# Altium PCB PCB1.PcbDoc (part 3 of 5)
Units mm, origin at the board's own origin, x right, y up, seen from the top; angles counter-clockwise.
Board outline 160 x 110 mm, 4 copper layers (Top Layer, Power Layer, GND Layer, Bottom Layer), stack 1.714 mm thick; 504 components, 362 nets, 1765 pads, 999 vias.
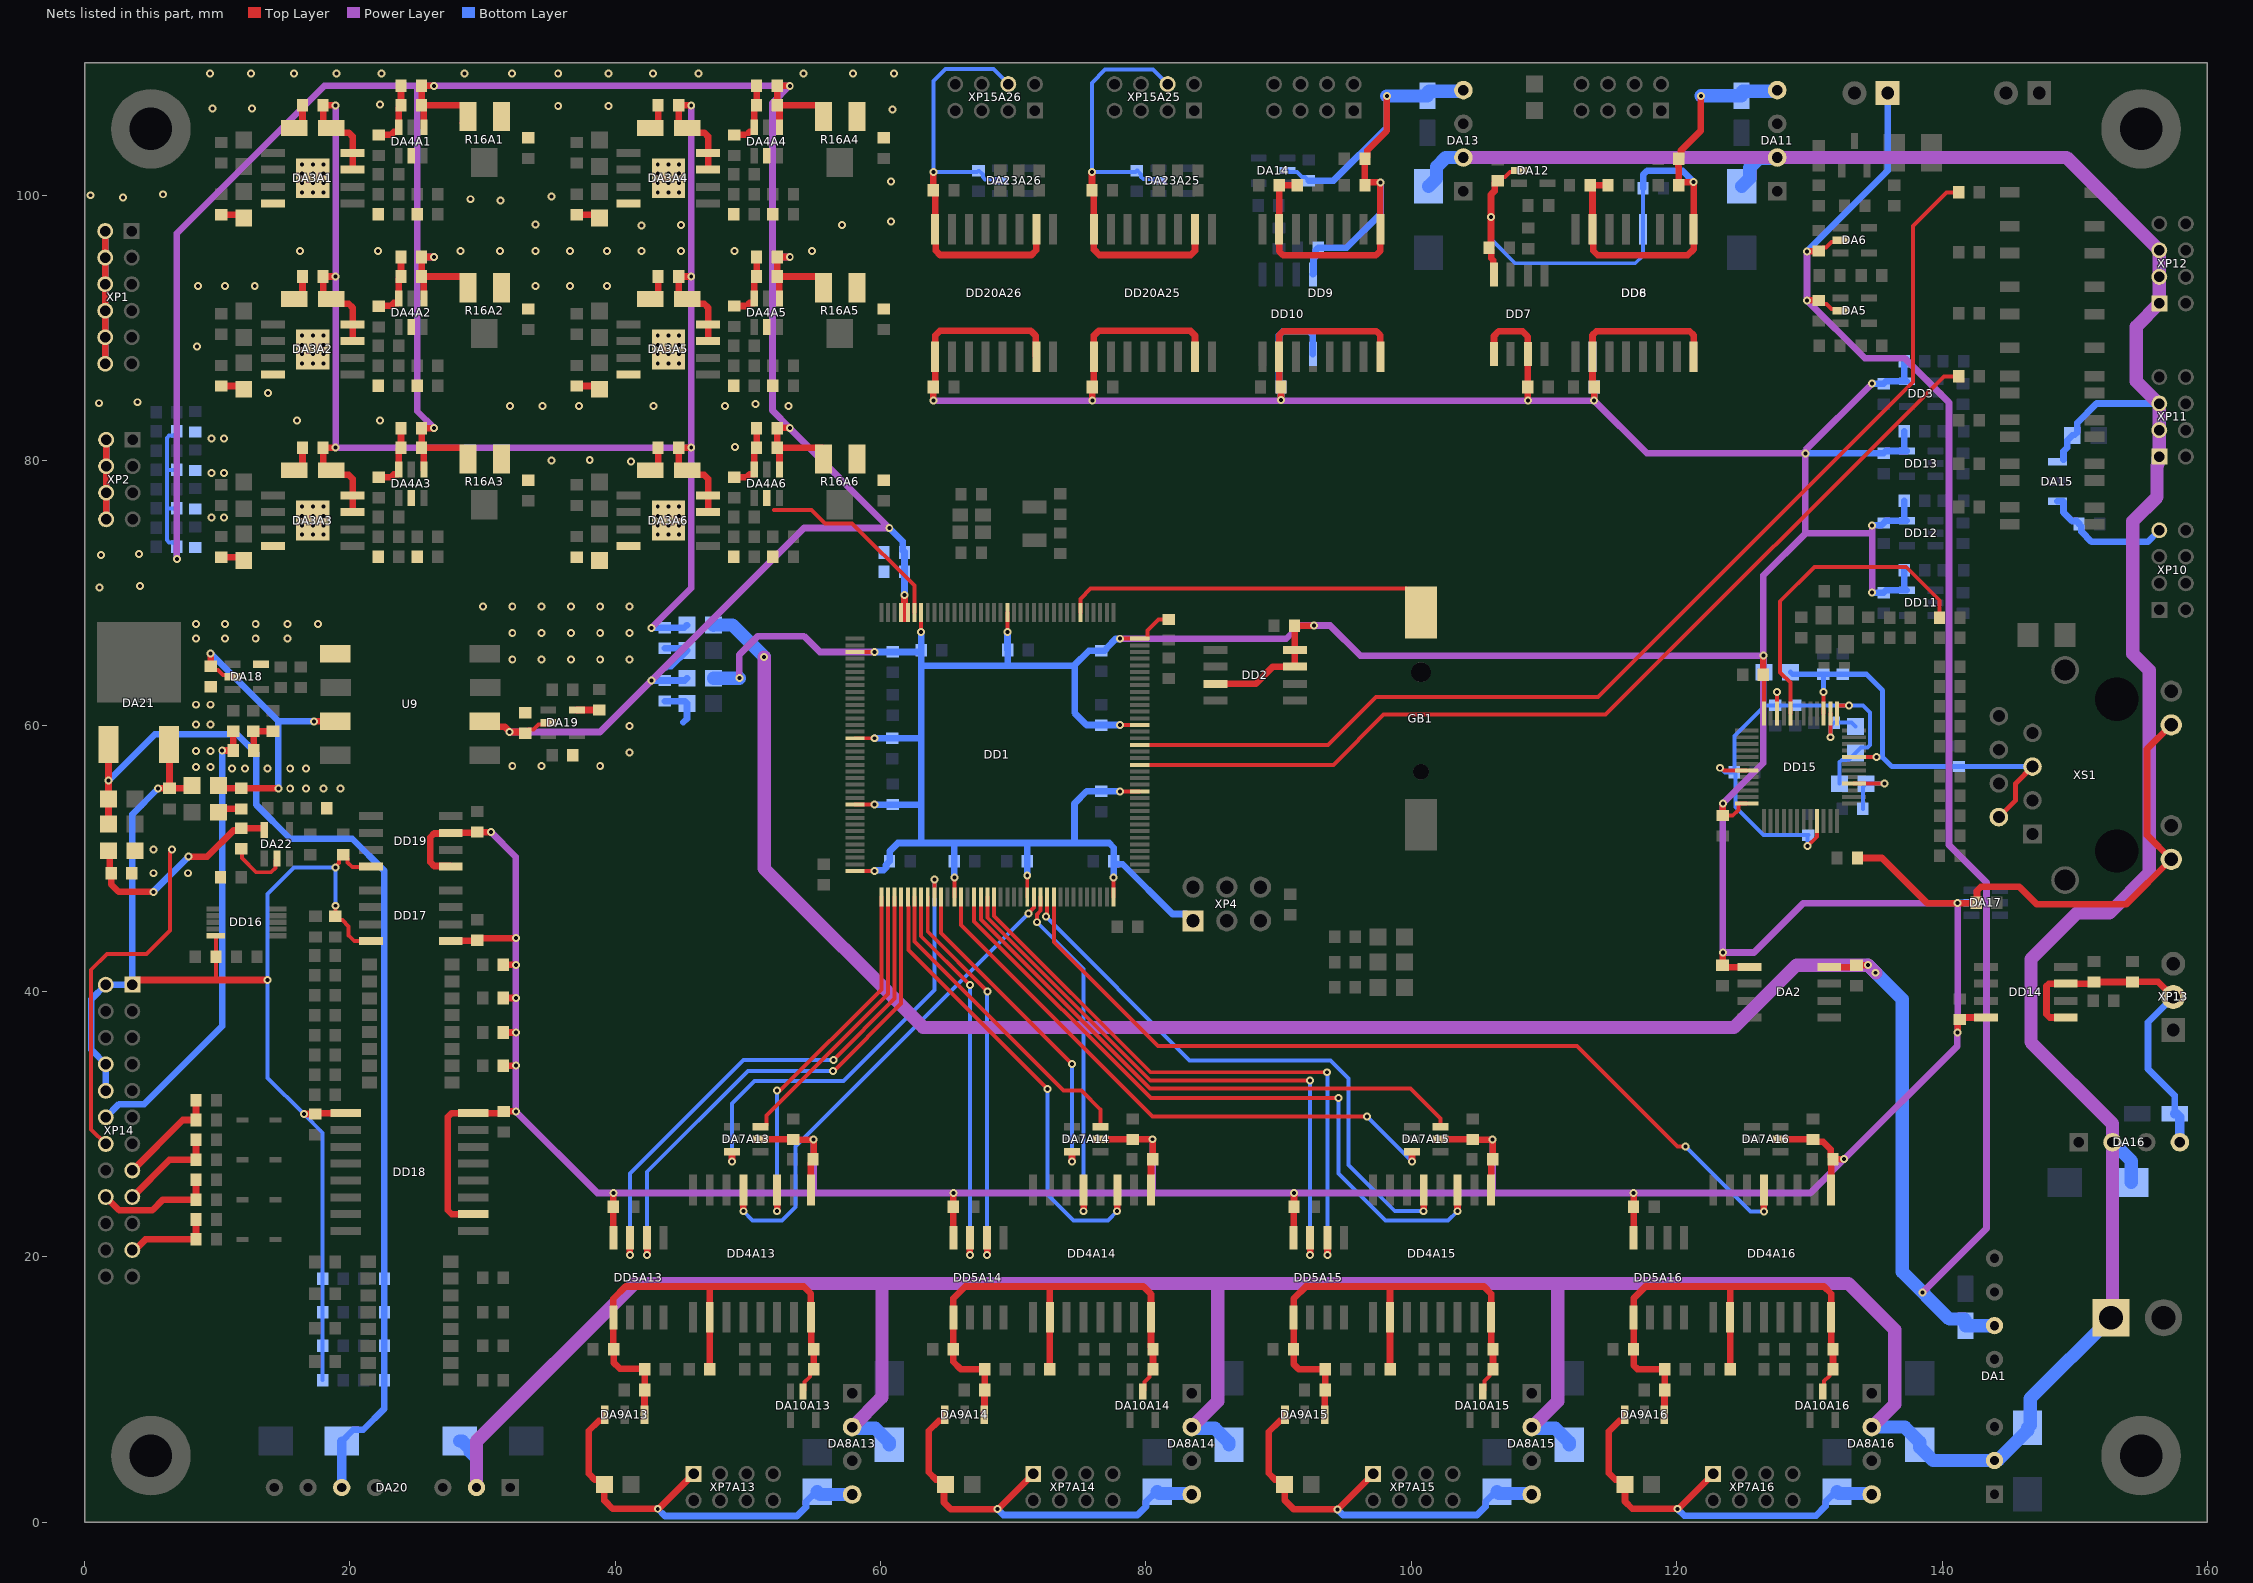
[diagram p4: the nets of this part, all layers, seen from the top]

## Via types
v1: diameter 0.6, hole 0.3, Top Layer to Bottom Layer, tented both sides, 927 vias
v2: diameter 0.6, hole 0.3, Top Layer to Bottom Layer, 72 vias

## Nets (pads, with @x,y where several pads share a name; then routed paths per layer and width w, separated by ;. In a path a pad name is that pad's centre, name@x,y a point inside that pad or via, vN(x,y) a via of type N, cw(c..) or ccw(c..) an arc to the next point about the centre after c; other vN are vias at no path point) (continued)
DRV3_ERR2: (continued)
  Top Layer w0.3: DD1.90@68.55,47.1 68.55,45.682 80.332,33.9 v1(93.65,33.9)
  Top Layer w0.5: v1(93.675,20.125) DD5A15.6@93.675,21.425
  Bottom Layer w0.3: v1(93.65,33.9) 93.662,33.888 93.662,20.137 v1(93.675,20.125)
DRV3_ON: DD1.87 DD4A15.3 | length 52.8
  Top Layer w0.3: DD1.87@67.05,47.1 67.05,45.273 80.373,31.95 v1(94.5,31.95)
  Top Layer w0.5: v1(103.475,23.425) DD4A15.3@103.475,25.025
  Bottom Layer w0.3: v1(94.5,31.95) 94.5,26.275 98.05,22.725 102.775,22.725 v1(103.475,23.425)
DRV3_SEL_MOD: DA7A15.6 DD1.88 | length 43.2
  Top Layer w0.3: DD1.88@67.55,47.1 67.55,45.409 80.284,32.675 99.925,32.675 102.2,30.4 DA7A15.6@102.2,29.8
DRV4_AN_MOD: DD1.99 DD4A16.5 | length 66.9
  Top Layer w0.3: DD1.99@73.05,47.1 73.05,43.728 80.903,35.875 112.475,35.875 120.05,28.3 v1(120.65,28.3)
  Top Layer w0.5: DD4A16.5@126.565,25.025 126.57,25.02 126.57,23.405 v1(126.575,23.4)
  Bottom Layer w0.3: v1(120.65,28.3) 123.029,25.921 125.55,23.4 v1(126.575,23.4)